# EAGLE board HV Board rev4 (EAGLE 8.4.1), part 1 of 2
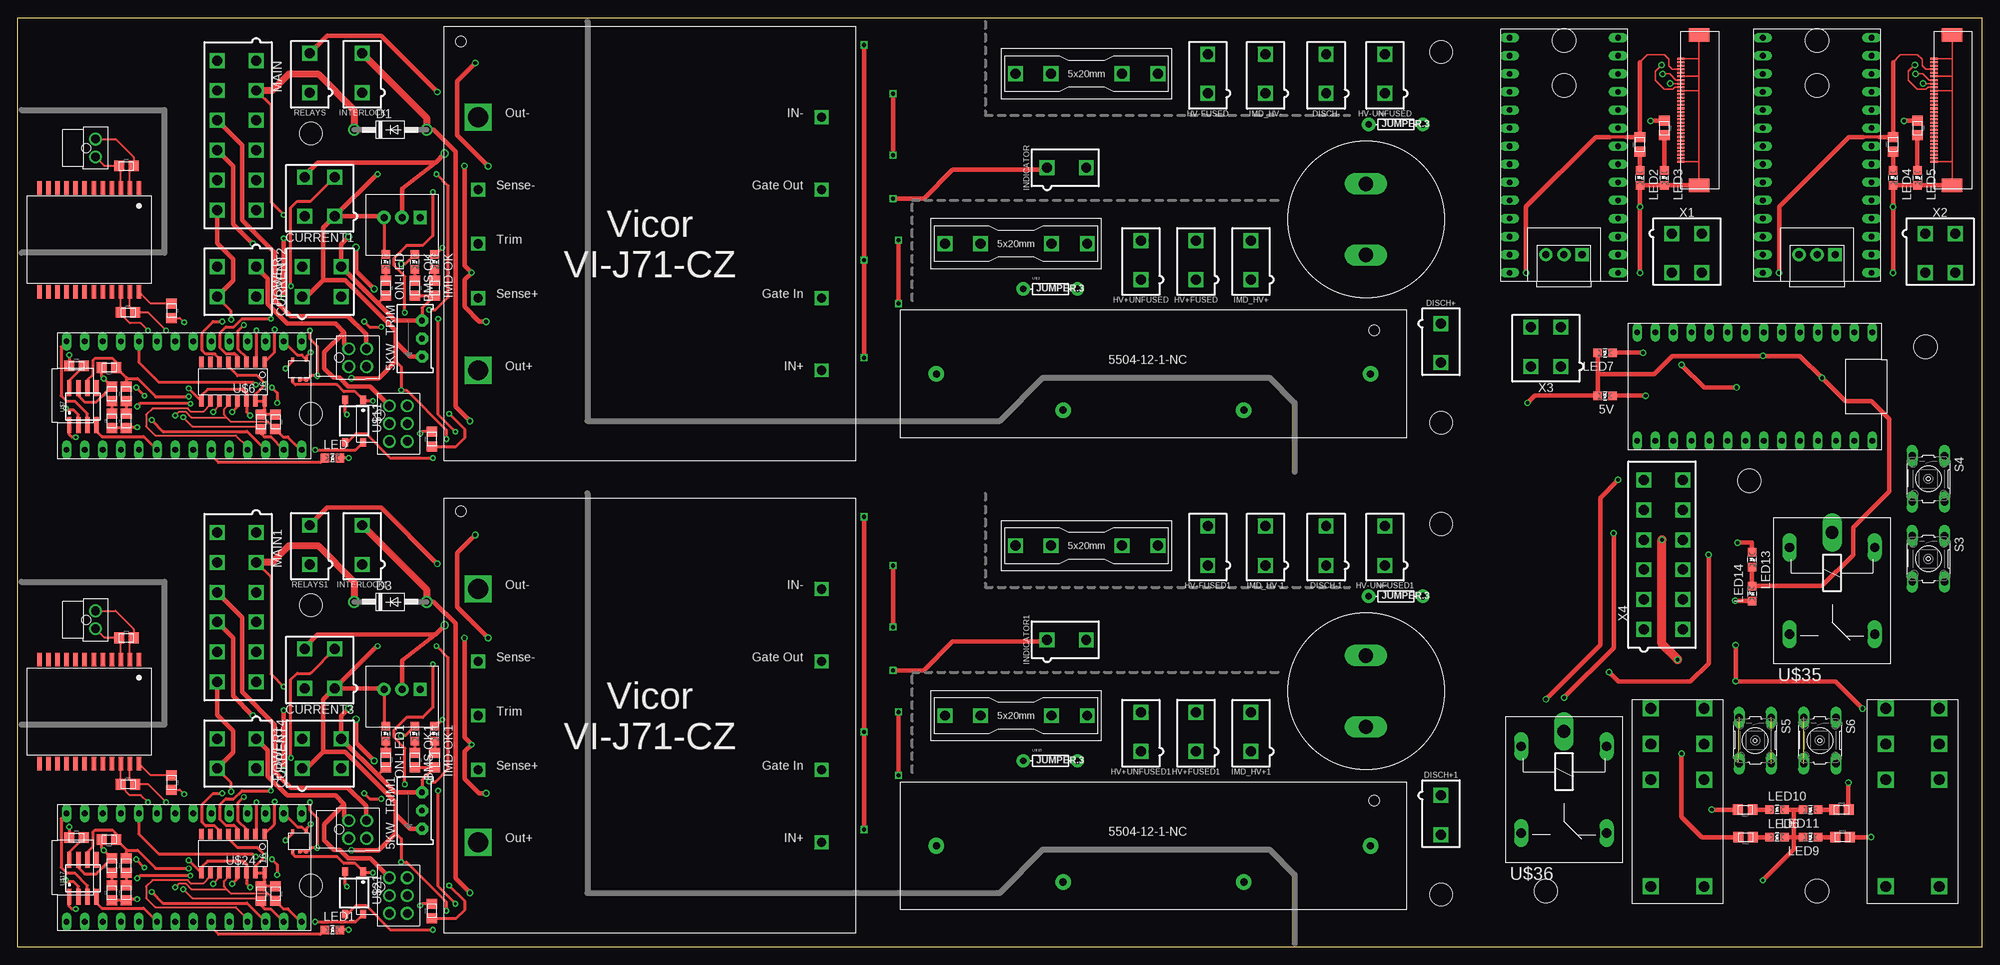
[diagram p0: board, top side]
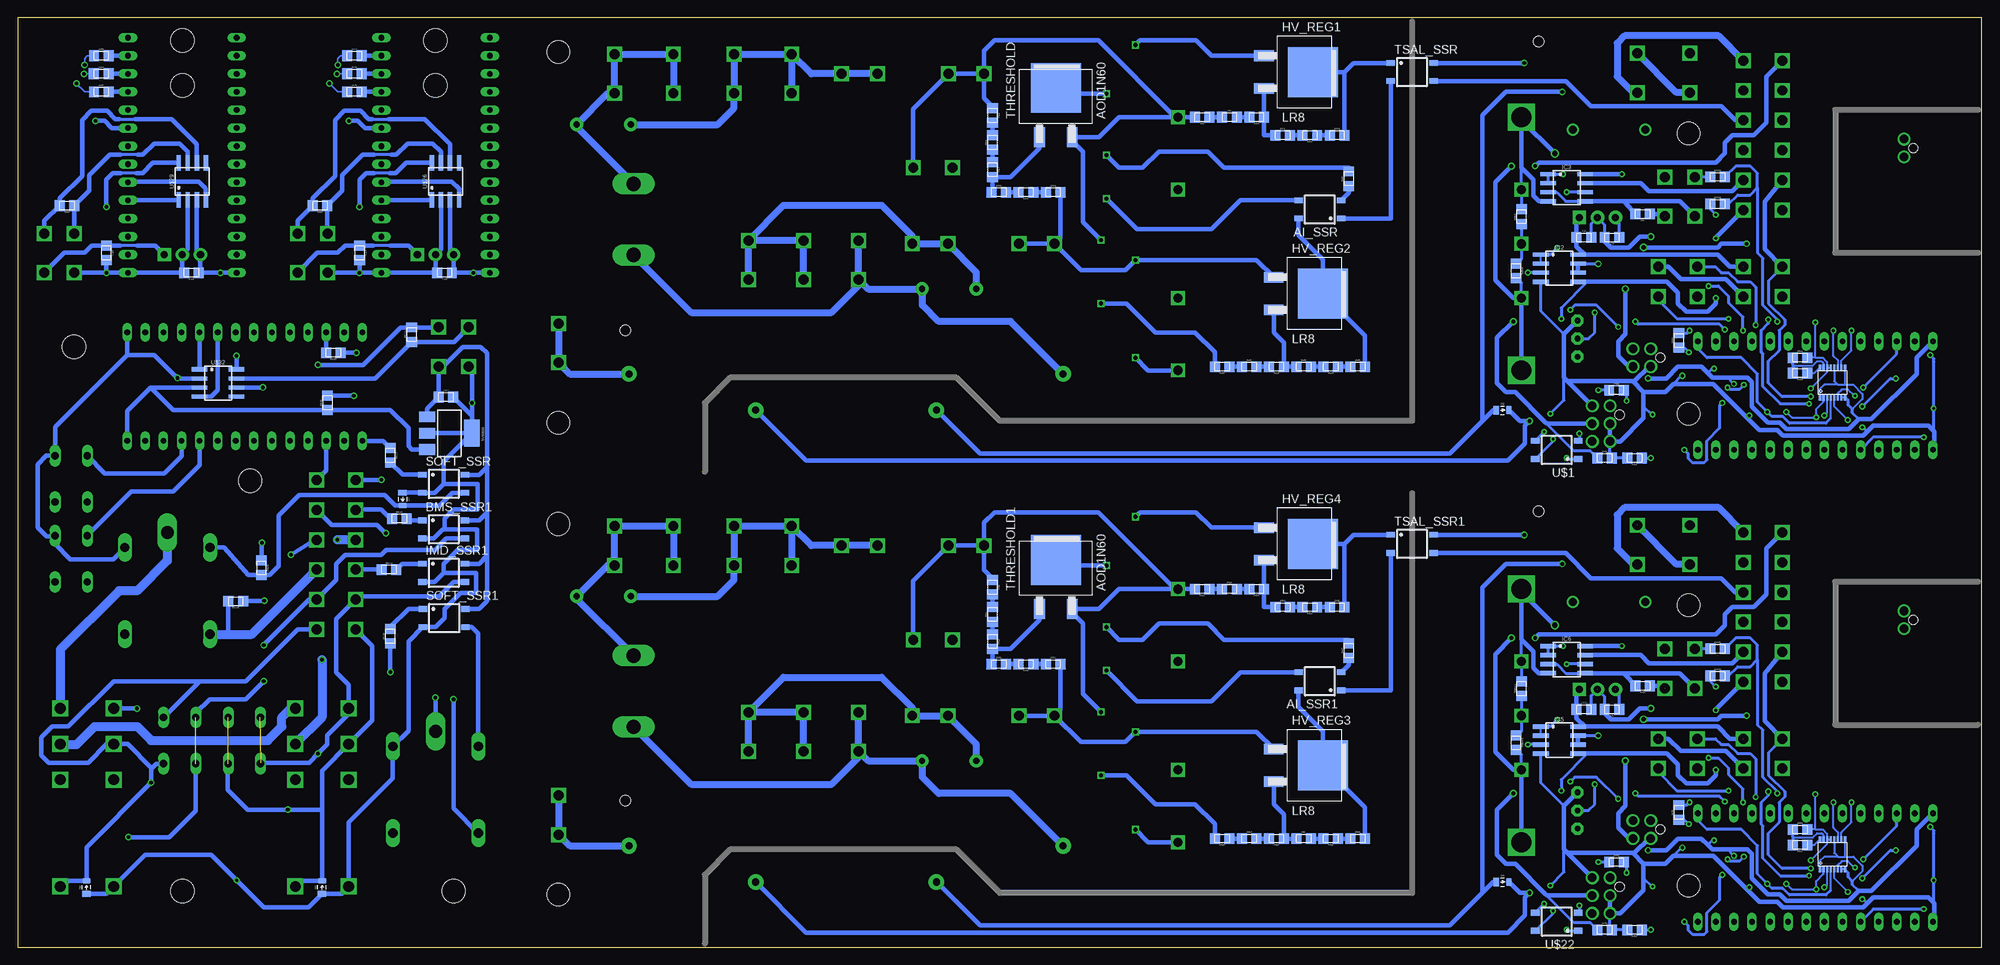
[diagram p1: board, bottom side, seen from below]

Size 275.84 x 130.56 mm. Coordinates in mm from the lower left corner, seen from the top.
Outline: 0,0 0,130.56 275.84,130.56 275.84,0 0,0
Copper layers (1*16): Top 0.035mm / dielectric 1.5mm / Bottom 0.035mm
Design rules "DRC Advanced Circuits": minimum track width 6mil, minimum drill 15mil, track to track 6mil, track to pad 6mil, pad to pad 6mil, via to via 6mil, smd to smd 6mil, copper to edge 40mil, drill to drill 6mil, minimum pad ring 10mil, minimum via ring 8mil, stop-mask expansion 4mil, vias tented up to drill 0mil, thermal gap 10mil
Holes 3.3 mm at 217.17,127.38 217.17,121.03 252.73,127.38 252.73,121.03 214.63,7.87 267.97,84.33 252.73,7.87 243.21,65.53
Holes 3.2 mm at 41.15,114.3 41.15,74.93 199.9,73.66 199.9,125.73 41.15,48.01 41.15,8.64 199.9,7.37 199.9,59.44
Holes 1.5 mm at 62.23,127.25 62.23,61.21 190.5,86.61 190.5,20.57

## Footprints (pad centres in the part's own frame; a part is rotated, then mirrored left to right if it is on the bottom)
TRIMPOT_3296 = drill 0.813 pad 1.676 octagon: 1 2.54,1.27; 2 0,1.27; 3 -2.54,1.27
LED-805 = smd 1.2 x 1.2: A 0,-1.05; C 0,1.05
SOT223 = smd 1.5 x 2.235: 1 -2.3,-3.15; 2 0,-3.15; 3 2.3,-3.15 | smd 3.8 x 2.2: 4 0,3.15
SOP04 = smd 0.8 x 1.2: 1 -1.27,-3; 2 1.27,-3; 3 1.27,3; 4 -1.27,3
LLS2V221MELZ = drill 2 long: P$1 -5,0; P$2 5,0
0805 = smd 1.4 x 1.5: 1 -1.025,0; 2 1.025,0
MINIFIT_5566-4 = drill 1.4 square: 1 2.1,-2.75; 2 -2.1,-2.75; 3 2.1,2.75; 4 -2.1,2.75
DO-41 = drill 1.118: A 5.08,0; C -5.08,0
0805_D = smd 0.8 x 1.2: A -0.9,0; C 0.9,0
MINIFIT_5566-2 = drill 1.4 square: 1 0,-2.75; 2 0,2.75
NANO-FIT_VERTICAL-4 = drill 1.2: P$1 -1.25,0; P$2 1.25,0; P$3 -1.25,2.5; P$4 1.25,2.5 | hole 1.3: 0,-1.34
0751.0110 = drill 1.4 square: L1 -10,0; L2 -5,0; R1 5,0; R2 10,0
TO-252 = smd 1.499 x 2.794: 1 -2.286,0; 3 2.286,0 | smd 7.01 x 7.01: 2(TAB) 0,6.909
OKI-78SR = drill 1 pad 1.88 square: 1 -2.54,0 | drill 1 pad 1.88: 2 0,0; 3 2.54,0
SOIC-08 = smd 0.6 x 2.2: 1 -1.905,-2.6; 2 -0.635,-2.6; 3 0.635,-2.6; 4 1.905,-2.6; 5 1.905,2.6; 6 0.635,2.6; 7 -0.635,2.6; 8 -1.905,2.6
TO-220 = drill 1 pad 1.88 square: 1 -2.54,0 | drill 1 pad 1.88: 2 0,0; 3 2.54,0
NANO-FIT_VERTICAL-6 = drill 1.2: P$1 -2.5,0; P$2 0,0; P$3 2.5,0; P$4 -2.5,2.5; P$5 0,2.5; P$6 2.5,2.5 | hole 1.3: -1.25,-1.34
NANO-FIT_VERTICAL-2 = drill 1.2: P$1 -1.25,0; P$2 1.25,0 | hole 1.3: 0,-1.34
MINIFIT_5566-12 = drill 1.4 square: 1 10.5,-2.75; 2 6.3,-2.75; 3 2.1,-2.75; 4 -2.1,-2.75; 5 -6.3,-2.75; 6 -10.5,-2.75; 7 10.5,2.75; 8 6.3,2.75; 9 2.1,2.75; 10 -2.1,2.75; 11 -6.3,2.75; 12 -10.5,2.75
B3F-10XX = drill 1.016 long: 1 -3.251,2.261; 2 3.251,2.261; 3 -3.251,-2.261; 4 3.251,-2.261
SM51589PEL = smd 0.635 x 1.905: 1 0,0; 2 1.27,0; 3 2.54,0; 4 3.81,0; 5 5.08,0; 6 6.35,0; 7 7.62,0; 8 8.89,0; 9 10.16,0; 10 11.43,0; 11 12.7,0; 12 13.97,0; 13 13.97,14.605; 14 12.7,14.605; 15 11.43,14.605; 16 10.16,14.605; 17 8.89,14.605; 18 7.62,14.605; 19 6.35,14.605; 20 5.08,14.605; 21 3.81,14.605; 22 2.54,14.605; 23 1.27,14.605; 24 0,14.605
AXIAL-0.3 = drill 0.9 pad 1.88: P$1 -3.81,0; P$2 3.81,0
HV_DCDC_VI-J71-CZ = drill 1.3 square: 1VIN+ 5.08,-12.7; 2GATEIN 5.08,-22.86; 3GATEOUT 5.08,-38.1; 4VIN- 5.08,-48.26; 6SENSE+ 53.34,-22.86; 7TRIM 53.34,-30.48; 8SENSE- 53.34,-38.1 | drill 2.8 square: 5VOUT+ 53.34,-12.7; 9VOUT- 53.34,-48.26
SOIC-16 = smd 0.61 x 1.524: 1 -4.445,-2.794; 2 -3.175,-2.794; 3 -1.905,-2.794; 4 -0.635,-2.794; 5 0.635,-2.794; 6 1.905,-2.794; 7 3.175,-2.794; 8 4.445,-2.794; 9 4.445,2.667; 10 3.175,2.667; 11 1.905,2.667; 12 0.635,2.667; 13 -0.635,2.667; 14 -1.905,2.667; 15 -3.175,2.667; 16 -4.445,2.667
MSOP-16 = smd 0.305 x 0.889: 1 -0.1,-0.5; 2 0.4,-0.5; 3 0.9,-0.5; 4 1.4,-0.5; 5 1.9,-0.5; 6 2.4,-0.5; 7 2.9,-0.5; 8 3.4,-0.5; 9 3.4,3.7; 10 2.9,3.7; 11 2.4,3.7; 12 1.9,3.7; 13 1.4,3.7; 14 0.9,3.7; 15 0.4,3.7; 16 -0.1,3.7
TEENSY_3.2_SIMPLE = drill 0.8 long: 3.3V 16.51,29.21; A0 16.51,3.81; A1 16.51,6.35; A2 16.51,8.89; A3 16.51,11.43; A4 16.51,13.97; A5 16.51,16.51; A6 16.51,19.05; A7 16.51,21.59; A8 16.51,24.13; A9 16.51,26.67; AGND 16.51,31.75; D0(RX1) 1.27,31.75; D1(TX1) 1.27,29.21; D2 1.27,26.67; D3(CANTX) 1.27,24.13; D4(CANRX) 1.27,21.59; D5 1.27,19.05; D6 1.27,16.51; D7(RX3) 1.27,13.97; D8(TX3) 1.27,11.43; D9(RX2) 1.27,8.89; D10(TX2) 1.27,6.35; D11 1.27,3.81; D12 1.27,1.27; D13 16.51,1.27; GND 1.27,34.29; VIN 16.51,34.29
SOT23-5 = smd 0.61 x 0.406: EN -2.794,0; GND -2.794,0.94; VCC 0,1.905; WDI 0,0; WDO -2.794,1.905
5504-12-1-NC = drill 1.016 pad 2.184: COIL+ 48.26,-14.097; COIL- 22.86,-14.097; CONTACT1 5.08,-9.017; CONTACT2 66.04,-9.017
FFC-30P-0.5MM = smd 1 x 0.284: 1 0,7.5; 2 0,7; 3 0,6.5; 4 0,6; 5 0,5.5; 6 0,5; 7 0,4.5; 8 0,4; 9 0,3.5; 10 0,3; 11 0,2.5; 12 0,2; 13 0,1.5; 14 0,1; 15 0,0.5; 16 0,0; 17 0,-0.5; 18 0,-1; 19 0,-1.5; 20 0,-2; 21 0,-2.5; 22 0,-3; 23 0,-3.5; 24 0,-4; 25 0,-4.5; 26 0,-5; 27 0,-5.5; 28 0,-6; 29 0,-6.5; 30 0,-7 | smd 2.85 x 1.905: PAD@0 -2.54,-10.302; PAD@1 -2.54,10.802
G2RL-2 = drill 1.5 square: 2 10.008,0; 3 5.004,0; 4 0,0; 5 0,7.493; 6 5.004,7.493; 7 10.008,7.493; COIL+ 25.019,0; COIL- 25.019,7.493
ZF112 = drill 1.321 long: 1 4.064,14.884; 2 4.064,2.896; O 16.256,14.884; S 16.256,2.896 | drill 1.803 long: P 1.956,8.89

## Placement (x,y rotation side)
5KW_TRIM  [TRIMPOT_3296]  55.5,85.47 270 top
5KW_TRIM1  [TRIMPOT_3296]  55.5,19.18 270 top
5V  [LED-805]  222.95,77.47 90 top
5VREG  [SOT223]  215.2,72.2 270 bottom
AI_SSR  CPC1002N  [SOP04]  92.96,103.63 90 bottom
AI_SSR1  CPC1002N  [SOP04]  92.96,37.34 90 bottom
BMS-OK  GREEN  [LED-805]  55.75,96.27 180 top
BMS-OK1  GREEN  [LED-805]  55.75,29.97 180 top
BMS_SSR1  CPC1002N  [SOP04]  216.03,58.67 270 bottom
C1  220uF  [LLS2V221MELZ]  189.36,102.23 90 top
C2  10uF  [0805]  55.88,99.69 0 bottom
C3  10uF  [0805]  51.94,99.69 180 bottom
C4  27pF  [0805]  21.59,89.41 270 top
C5  10uF  [0805]  51.94,33.4 180 bottom
C6  220uF  [LLS2V221MELZ]  189.36,35.94 90 top
C7  560pF  [0805]  13.21,7.62 90 top
C8  560pF  [0805]  13.21,73.91 90 top
C9  560pF  [0805]  15.24,73.91 90 top
C10  560pF  [0805]  15.24,7.62 90 top
C11  27pF  [0805]  21.59,23.11 270 top
C12  10uF  [0805]  55.88,33.4 0 bottom
C13  0.1uF  [0805]  215.9,94.74 180 bottom
C14  0.33uF  [0805]  227.84,97.54 270 bottom
C15  0.1uF  [0805]  251.46,94.74 180 bottom
C16  0.33uF  [0805]  263.4,97.54 270 bottom
C17  .22uF  [0805]  215.71,77.28 0 bottom
CURRENT1  CONNECTOR-4  [MINIFIT_5566-4]  42.42,105.41 0 top
CURRENT2  CONNECTOR-4  [MINIFIT_5566-4]  42.67,93.47 270 top
CURRENT3  CONNECTOR-4  [MINIFIT_5566-4]  42.42,39.12 0 top
CURRENT4  CONNECTOR-4  [MINIFIT_5566-4]  42.67,27.18 270 top
D1  DIODE  [DO-41]  52.32,114.81 0 top
D2  DIODE0805  [0805_D]  67.31,75.44 0 bottom
D3  DIODE  [DO-41]  52.32,48.51 0 top
D4  DIODE0805  [0805_D]  67.31,9.14 0 bottom
D5  DIODE0805  [0805_D]  233.11,8.38 90 bottom
D6  DIODE0805  [0805_D]  266.19,8.38 90 bottom
D7  DIODE0805  [0805_D]  221.81,62.93 270 bottom
DISCH+  DISCHARGE+  [MINIFIT_5566-2]  199.9,84.84 180 top
DISCH+1  DISCHARGE+  [MINIFIT_5566-2]  199.9,18.54 180 top
DISCH-  DISCHARGE -  [MINIFIT_5566-2]  183.77,122.68 0 top
DISCH-1  DISCHARGE -  [MINIFIT_5566-2]  183.77,56.39 0 top
EM  CONNECTOR-4  [NANO-FIT_VERTICAL-4]  46.48,82.8 270 top
EM1  CONNECTOR-4  [NANO-FIT_VERTICAL-4]  46.48,16.51 270 top
FUSE  1A  [0751.0110]  140.21,98.81 180 top
FUSE1  1A  [0751.0110]  150.11,122.68 180 top
FUSE2  1A  [0751.0110]  140.21,32.51 180 top
FUSE3  1A  [0751.0110]  150.11,56.39 180 top
HV+FUSED  FUSED+  [MINIFIT_5566-2]  165.48,96.52 0 top
HV+FUSED1  FUSED+  [MINIFIT_5566-2]  165.48,30.23 0 top
HV+UNFUSED  FSAE  [MINIFIT_5566-2]  157.73,96.52 0 top
HV+UNFUSED1  FSAE  [MINIFIT_5566-2]  157.73,30.23 0 top
HV-FUSED  FUSED-  [MINIFIT_5566-2]  167.13,122.68 0 top
HV-FUSED1  FUSED-  [MINIFIT_5566-2]  167.13,56.39 0 top
HV-UNFUSED  FSAE  [MINIFIT_5566-2]  192.02,122.68 0 top
HV-UNFUSED1  FSAE  [MINIFIT_5566-2]  192.02,56.39 0 top
HV_REG1  LR8  [TO-252]  100.84,122.94 270 bottom
HV_REG2  LR8  [TO-252]  99.44,91.82 270 bottom
HV_REG3  LR8  [TO-252]  99.44,25.53 270 bottom
HV_REG4  LR8  [TO-252]  100.84,56.64 270 bottom
IC1  OKI-78SR  [OKI-78SR]  53.98,102.49 180 top
IC2  NE5532SOIC  [SOIC-08]  59.31,95.38 270 bottom
IC3  NE5532SOIC  [SOIC-08]  58.29,106.68 270 bottom
IC4  OKI-78SR  [OKI-78SR]  53.98,36.19 180 top
IC5  NE5532SOIC  [SOIC-08]  59.31,29.08 270 bottom
IC6  NE5532SOIC  [SOIC-08]  58.29,40.39 270 bottom
IC7  [TO-220]  217.17,97.28 180 top
IC8  [TO-220]  252.73,97.28 180 top
IMD  CONNECTOR-6  [NANO-FIT_VERTICAL-6]  52.2,73.53 270 top
IMD1  CONNECTOR-6  [NANO-FIT_VERTICAL-6]  52.2,7.24 270 top
IMD-OK  YELLOW  [LED-805]  58.55,96.27 180 top
IMD-OK1  YELLOW  [LED-805]  58.55,29.97 180 top
IMD_HV+  IMD+  [MINIFIT_5566-2]  173.23,96.52 0 top
IMD_HV+1  IMD+  [MINIFIT_5566-2]  173.23,30.23 0 top
IMD_HV-  IMD-  [MINIFIT_5566-2]  175.26,122.68 0 top
IMD_HV-1  IMD-  [MINIFIT_5566-2]  175.26,56.39 0 top
IMD_SSR1  CPC1002N  [SOP04]  216.03,52.58 270 bottom
INDICATOR  INDICATOR  [MINIFIT_5566-2]  147.32,109.47 270 top
INDICATOR1  INDICATOR  [MINIFIT_5566-2]  147.32,43.18 270 top
INTERLOCK  [MINIFIT_5566-2]  48.39,122.81 0 top
INTERLOCK1  [MINIFIT_5566-2]  48.39,56.52 0 top
ISOSPI  CONNECTOR-2  [NANO-FIT_VERTICAL-2]  10.92,112.27 270 top
ISOSPI1  CONNECTOR-2  [NANO-FIT_VERTICAL-2]  10.92,45.97 270 top
LED  BLUE  [LED-805]  44.2,68.71 270 top
LED1  BLUE  [LED-805]  44.2,2.41 270 top
LED2  [LED-805]  227.84,108.08 180 top
LED3  [LED-805]  231.27,108.08 180 top
LED4  [LED-805]  263.4,108.08 180 top
LED5  [LED-805]  266.83,108.08 180 top
LED6  [LED-805]  247.08,15.43 270 top
LED7  [LED-805]  222.95,83.5 90 top
LED9  [LED-805]  251.78,15.43 90 top
LED10  [LED-805]  247.08,19.3 270 top
LED11  [LED-805]  251.78,19.3 90 top
LED13  [LED-805]  243.59,54.42 180 top
LED14  [LED-805]  243.59,49.66 0 top
MAIN  CONNECTOR-12  [MINIFIT_5566-12]  30.73,114.05 90 top
MAIN1  CONNECTOR-12  [MINIFIT_5566-12]  30.73,47.75 90 top
ON-LED  PURPLE  [LED-805]  51.69,96.27 180 top
ON-LED1  PURPLE  [LED-805]  51.69,29.97 180 top
POWER  CONNECTOR-4  [MINIFIT_5566-4]  30.73,93.47 90 top
POWER1  CONNECTOR-4  [MINIFIT_5566-4]  30.73,27.18 90 top
R1  2k  [0805]  95.25,15.24 0 bottom
R2  820  [0805]  58.55,26.29 90 top
R3  820  [0805]  58.55,92.58 90 top
R4  820  [0805]  55.75,92.58 270 top
R5  270  [0805]  51.69,92.58 270 top
R6  10k  [0805]  47.62,103 180 bottom
R7  820  [0805]  55.75,26.29 270 top
R8  8.2k  [0805]  109.47,116.59 180 bottom
R9  8.2k  [0805]  105.66,116.59 0 bottom
R10  8.2k  [0805]  101.85,116.59 180 bottom
R11  2k  [0805]  98.17,114.05 0 bottom
R12  2k  [0805]  94.36,114.05 180 bottom
R13  2k  [0805]  90.55,114.05 0 bottom
R14  510k  [0805]  130.43,106.04 0 bottom
R15  510k  [0805]  134.24,106.04 180 bottom
R16  510k  [0805]  138.05,106.04 0 bottom
R17  43k  [0805]  138.94,109.22 270 bottom
R18  43k  [0805]  138.94,113.03 90 bottom
R19  43k  [0805]  138.94,116.84 270 bottom
R20  20k  [0805]  106.68,81.53 180 bottom
R21  20k  [0805]  102.87,81.53 0 bottom
R22  20k  [0805]  99.06,81.53 180 bottom
R23  2k  [0805]  95.25,81.53 0 bottom
R24  2k  [0805]  91.44,81.53 180 bottom
R25  2k  [0805]  87.63,81.53 0 bottom
R26  1k  [0805]  88.9,107.95 90 bottom
R27  120  [0805]  12.83,81.41 180 top
R28  100  [0805]  13.21,77.72 90 top
R29  100  [0805]  15.24,77.72 90 top
R30  1k  [0805]  8.26,81.66 0 top
R31  43  [0805]  48.77,68.71 180 bottom
R32  20k  [0805]  99.06,15.24 180 bottom
R33  1k  [0805]  25.53,80.64 180 bottom
R34  1k  [0805]  25.53,82.8 0 bottom
R35  120  [0805]  15.49,89.15 0 top
R36  2k  [0805]  34.16,73.79 270 top
R37  2k  [0805]  36.2,73.79 270 top
R38  430  [0805]  51.31,78.23 0 bottom
R39  200  [0805]  58.17,71.37 90 top
R40  100  [0805]  15.24,109.73 0 top
R41  2k  [0805]  52.96,68.71 0 bottom
R42  10k  [0805]  42.55,85.22 90 bottom
R43  10k  [0805]  47.62,36.7 180 bottom
R44  270  [0805]  51.69,26.29 270 top
R45  510k  [0805]  138.05,39.75 0 bottom
R46  43k  [0805]  138.94,50.55 270 bottom
R47  1k  [0805]  88.9,41.66 90 bottom
R48  2k  [0805]  90.55,47.75 0 bottom
R49  510k  [0805]  134.24,39.75 180 bottom
R50  510k  [0805]  130.43,39.75 0 bottom
R51  43k  [0805]  138.94,46.74 90 bottom
R52  43k  [0805]  138.94,42.93 270 bottom
R53  2k  [0805]  94.36,47.75 180 bottom
R54  2k  [0805]  98.17,47.75 0 bottom
R55  2k  [0805]  91.44,15.24 180 bottom
R56  2k  [0805]  87.63,15.24 0 bottom
R57  20k  [0805]  102.87,15.24 0 bottom
R58  20k  [0805]  106.68,15.24 180 bottom
R59  8.2k  [0805]  101.85,50.29 180 bottom
R60  8.2k  [0805]  105.66,50.29 0 bottom
R61  8.2k  [0805]  109.47,50.29 180 bottom
R62  120  [0805]  12.83,15.11 180 top
R63  100  [0805]  13.21,11.43 90 top
R64  100  [0805]  15.24,11.43 90 top
R65  1k  [0805]  8.26,15.37 0 top
R66  43  [0805]  48.77,2.41 180 bottom
R67  1k  [0805]  25.53,14.35 180 bottom
R68  1k  [0805]  25.53,16.51 0 bottom
R69  120  [0805]  15.49,22.86 0 top
R70  2k  [0805]  34.16,7.49 270 top
R71  2k  [0805]  36.2,7.49 270 top
R72  430  [0805]  51.31,11.94 0 bottom
R73  200  [0805]  58.17,5.08 90 top
R74  100  [0805]  15.24,43.43 0 top
R75  2k  [0805]  52.96,2.41 0 bottom
R76  10k  [0805]  42.55,18.92 90 bottom
R77  [0805]  228.56,125.22 0 bottom
R78  [0805]  228.56,122.69 0 bottom
R79  [0805]  228.56,120.15 0 bottom
R80  120  [0805]  233.39,104.16 180 bottom
R81  [0805]  227.84,112.77 90 top
R82  [0805]  231.27,115.06 270 top
R83  [0805]  264.12,125.22 0 bottom
R84  [0805]  264.12,122.69 0 bottom
R85  [0805]  264.12,120.15 0 bottom
R86  120  [0805]  268.95,104.16 180 bottom
R87  [0805]  263.4,112.77 90 top
R88  [0805]  266.83,115.06 270 top
R105  [0805]  231.52,83.5 180 bottom
R106  [0805]  232.35,76.45 90 bottom
R107  [0805]  242.63,19.3 180 top
R108  [0805]  256.16,19.3 0 top
R109  [0805]  241.62,53.28 270 bottom
R110  [0805]  245.24,48.58 180 bottom
R111  [0805]  242.7,15.43 180 top
R112  [0805]  256.29,15.43 0 top
R113  120  [0805]  220.54,86.04 90 bottom
R114  [0805]  223.71,53.02 0 bottom
R115  [0805]  222.25,60.2 0 bottom
R116  [0805]  223.52,43.69 90 bottom
R117  [0805]  223.52,69.09 270 bottom
R118  43k  [0805]  37.08,104.39 0 bottom
R119  12k  [0805]  37.08,108.2 0 bottom
R120  43k  [0805]  37.08,38.1 0 bottom
R121  12k  [0805]  37.08,41.91 0 bottom
RELAYS  [MINIFIT_5566-2]  41.02,122.81 0 top
RELAYS1  [MINIFIT_5566-2]  41.02,56.52 0 top
S3  [B3F-10XX]  268.35,54.55 270 top
S4  [B3F-10XX]  268.35,65.79 270 top
S5  [B3F-10XX]  244.03,29.02 270 top
S6  [B3F-10XX]  253.11,29.02 270 top
SOFT_SSR  CPC1002N  [SOP04]  216.03,65.09 270 bottom
SOFT_SSR1  CPC1002N  [SOP04]  215.96,46.23 270 bottom
THRESHOLD  AOD1N60  [TO-252]  130.05,113.79 0 bottom
THRESHOLD1  AOD1N60  [TO-252]  130.05,47.5 0 bottom
TRIM+  [0805]  65.41,95 270 bottom
TRIM+1  [0805]  65.41,28.7 270 bottom
TRIM-  [0805]  64.64,102.62 90 bottom
TRIM-1  [0805]  64.64,36.32 90 bottom
TSAL_SSR  CPC1002N  [SOP04]  80.01,122.94 270 bottom
TSAL_SSR1  CPC1002N  [SOP04]  80.01,56.64 270 bottom
U$1  [SOP04]  59.69,69.85 90 bottom
U$2  SM51589PEL  [SM51589PEL]  17.02,106.68 180 top
U$3  JUMPER.3  [AXIAL-0.3]  145.03,92.46 0 top
U$4  JUMPER.3  [AXIAL-0.3]  193.55,115.57 0 top
U$5  HV_DCDC_VI-J71-CZ  [HV_DCDC_VI-J71-CZ]  117.98,68.33 180 top
U$6  MCP3208SOIC  [SOIC-16]  30.23,79.38 180 top
U$7  MCP2551  [SOIC-08]  9.14,75.95 0 top
U$8  LTC6820  [MSOP-16]  22.61,77.72 0 bottom
U$9  TEENSY_3.2_SIMPLE  [TEENSY_3.2_SIMPLE]  41.15,68.58 90 top
U$10  STWD100  [SOT23-5]  40.51,82.55 90 top
U$11  [SOP04]  47.24,73.91 180 top
U$12  5504-12-1-NC  [5504-12-1-NC]  123.95,89.53 0 top
U$13  5504-12-1-NC  [5504-12-1-NC]  123.95,23.24 0 top
U$14  HV_DCDC_VI-J71-CZ  [HV_DCDC_VI-J71-CZ]  117.98,2.03 180 top
U$15  JUMPER.3  [AXIAL-0.3]  145.03,26.16 0 top
U$16  JUMPER.3  [AXIAL-0.3]  193.55,49.28 0 top
U$17  MCP2551  [SOIC-08]  9.14,9.65 0 top
U$18  LTC6820  [MSOP-16]  22.61,11.43 0 bottom
U$19  TEENSY_3.2_SIMPLE  [TEENSY_3.2_SIMPLE]  41.15,2.29 90 top
U$20  STWD100  [SOT23-5]  40.51,16.26 90 top
U$21  [SOP04]  47.24,7.62 180 top
U$22  [SOP04]  59.69,3.56 90 bottom
U$23  SM51589PEL  [SM51589PEL]  17.02,40.39 180 top
U$24  MCP3208SOIC  [SOIC-16]  30.23,13.08 180 top
U$25  TEENSY_3.2_SIMPLE  [TEENSY_3.2_SIMPLE]  226.06,129.03 180 top
U$26  MCP2551  [SOIC-08]  215.77,107.57 0 bottom
U$27  FFC-30P-0.5MM  [FFC-30P-0.5MM]  233.59,117.82 180 top
U$28  TEENSY_3.2_SIMPLE  [TEENSY_3.2_SIMPLE]  261.62,129.03 180 top
U$29  MCP2551  [SOIC-08]  251.33,107.57 0 bottom
U$30  FFC-30P-0.5MM  [FFC-30P-0.5MM]  269.15,117.82 180 top
U$31  TEENSY_3.2_SIMPLE  [TEENSY_3.2_SIMPLE]  226.19,87.63 270 top
U$32  MCP2551  [SOIC-08]  247.71,79.25 270 bottom
U$33  G2RL-2-DC12  [G2RL-2]  229.36,33.53 270 top
U$34  G2RL-2-DC12  [G2RL-2]  262.38,33.53 270 top
U$35  G5LE  [ZF112]  245.94,60.2 270 top
U$36  G5LE  [ZF112]  208.28,32.26 270 top
X1  CONNECTOR-4  [MINIFIT_5566-4]  234.44,97.5 180 top
X2  CONNECTOR-4  [MINIFIT_5566-4]  270,97.5 180 top
X3  CONNECTOR-4  [MINIFIT_5566-4]  214.63,84.33 0 top
X4  CONNECTOR-12  [MINIFIT_5566-12]  231.14,55.12 270 top

## Library data of the parts
5KW_TRIM 5KW_TRIM1 5V 5VREG AI_SSR AI_SSR1 BMS-OK BMS-OK1 BMS_SSR1 C1-C17 D1-D7 EM EM1 FUSE FUSE1-FUSE3 HV_REG1-HV_REG4 IC1-IC8 IMD IMD1 IMD-OK IMD-OK1 IMD_SSR1 ISOSPI ISOSPI1 LED LED1-LED7 LED9-LED11 LED13 LED14 ON-LED ON-LED1 R1-R88 R105-R121 SOFT_SSR SOFT_SSR1 THRESHOLD THRESHOLD1 TRIM+ TRIM+1 TRIM- TRIM-1 TSAL_SSR TSAL_SSR1 U$1-U$36 = HyTechDevices
CURRENT1-CURRENT4 MAIN MAIN1 POWER POWER1 X1-X4 = HyTechDevices; OC_FARNELL: unknown; OC_NEWARK: unknown
DISCH+ DISCH+1 DISCH- DISCH-1 HV+FUSED HV+FUSED1 HV+UNFUSED HV+UNFUSED1 HV-FUSED HV-FUSED1 HV-UNFUSED HV-UNFUSED1 IMD_HV+ IMD_HV+1 IMD_HV- IMD_HV-1 INDICATOR INDICATOR1 INTERLOCK INTERLOCK1 RELAYS RELAYS1 = HyTechDevices; OC_FARNELL: 1822072; OC_NEWARK: unknown
S3-S6 = HyTechDevices; MPN: B3F-1000; OC_FARNELL: 176432; OC_NEWARK: 36M3542

## Nets
5KW_TRIG: 5KW_TRIM.2 IC3.6
5KW_TRIG1: 5KW_TRIM1.2 IC6.6
+3V1: U$18.6 U$19.3.3V
+3V3: U$8.6 U$9.3.3V
+5V: 5KW_TRIM.1 C3.1 CURRENT1.1 CURRENT2.1 IC1.3 IC3.8 ON-LED.A R6.1 R36.1 R37.1 R38.1 U$1.4 U$6.5 U$6.15 U$6.16 U$7.3 U$8.1 U$8.7 U$8.8 U$8.9 U$8.12 U$9.VIN U$10.VCC
+5V1: 5KW_TRIM1.1 C5.1 CURRENT3.1 CURRENT4.1 IC4.3 IC6.8 ON-LED1.A R43.1 R70.1 R71.1 R72.1 U$17.3 U$18.1 U$18.7 U$18.8 U$18.9 U$18.12 U$19.VIN U$20.VCC U$22.4 U$24.5 U$24.15 U$24.16
+5V2: C13.1 IC7.3 R81.2 U$25.VIN U$26.3 U$27.26 U$27.27
+5V3: C15.1 IC8.3 R87.2 U$28.VIN U$29.3 U$30.26 U$30.27
+5V4: 5VREG.3 R106.1 U$31.VIN U$32.3
+12V: C2.1 EM.P$1 IC1.1 IC2.8 IMD.P$1 POWER.1
+12V1: C12.1 EM1.P$1 IC4.1 IC5.8 IMD1.P$1 POWER1.1
+12V2: C14.1 IC7.1 X1.4
+12V3: C16.1 IC8.1 X2.4
+12V4: 5VREG.1 BMS_SSR1.4 C17.1 IMD_SSR1.4 SOFT_SSR1.4 SOFT_SSR.4 X3.1
BMS_12V: BMS_SSR1.3 R112.2 S6.3 S6.4 U$34.4 X4.8
BMS_INRLK: R116.1 X4.10
BMS_OK: IC2.5 MAIN.6 U$1.3
BMS_OK1: IC5.5 MAIN1.6 U$22.3
BMS_OK2: D6.C R108.2 S6.1 S6.2 U$34.3 U$34.COIL- X4.7
BMS_WATCH: U$1.1 U$11.3
BMS_WATCH1: U$21.3 U$22.1
BSPD_CUR_FAULT: IC3.7 MAIN.5
BSPD_CUR_FAULT1: IC6.7 MAIN1.5
BTN_X: S4.3 U$31.A9
BTN_Y: S3.3 U$31.A8
CANH: MAIN.12 POWER.4 R27.2 R28.2 U$7.7
CANH1: MAIN1.12 POWER1.4 R62.2 R63.2 U$17.7
CANH2: R80.1 U$26.7 X1.1
CANH3: R86.1 U$29.7 X2.1
CANH4: R113.1 U$32.7 X3.4
CANL: MAIN.11 POWER.3 R27.1 R29.2 U$7.6
CANL1: MAIN1.11 POWER1.3 R62.1 R64.2 U$17.6
CANL2: R80.2 U$26.6 X1.2
CANL3: R86.2 U$29.6 X2.2
CANL4: R113.2 U$32.6 X3.3
CANRX: U$25.D4(CANRX) U$26.4
CANRX1: U$28.D4(CANRX) U$29.4
CANRX2: U$31.D4(CANRX) U$32.4
CANTX: U$25.D3(CANTX) U$26.1
CANTX1: U$28.D3(CANTX) U$29.1
CANTX2: U$31.D3(CANTX) U$32.1
CS_LTC1: U$18.5 U$19.D10(TX2)
CS_LTC6820: U$8.5 U$9.D10(TX2)
CS_MCP1: U$19.D9(RX2) U$24.10
CS_MCP3208: U$6.10 U$9.D9(RX2)
CUR_SENSE_1: IC3.1 IC3.2 U$6.1
CUR_SENSE_1_RAW: CURRENT1.2 IC3.3 IC3.5 R6.2
CUR_SENSE_1_RAW1: CURRENT3.2 IC6.3 IC6.5 R43.2
CUR_SENSE_2: CURRENT2.2 U$6.3
CUR_SENSE_3: CURRENT4.2 U$24.3
CUR_SENSE_4: IC6.1 IC6.2 U$24.1
DISCHARGE_RELAY_GND: D2.A RELAYS.2 U$12.COIL-
DISCHARGE_RELAY_GND1: D4.A RELAYS1.2 U$13.COIL-
EM_IO1: EM.P$3 MAIN.9
EM_IO2: EM.P$4 MAIN.10
EM_IO3: EM1.P$3 MAIN1.9
EM_IO4: EM1.P$4 MAIN1.10
GND: 5KW_TRIM.3 C2.2 C3.2 C4.2 C8.1 C9.1 CURRENT1.4 CURRENT2.4 EM.P$2 IC1.2 IC2.4 IC3.4 IMD.P$2 IMD.P$3 IMD.P$4 POWER.2 R3.1 R4.2 R5.2 R30.1 R31.2 R34.2 R39.1 R41.2 R42.2 R119.1 TRIM-.2 U$5.8SENSE- U$5.9VOUT- U$6.9 U$6.14 U$7.2 U$8.13 U$8.14 U$9.GND U$10.EN U$10.GND U$11.2
GND1: 5KW_TRIM1.3 C5.2 C7.1 C10.1 C11.2 C12.2 CURRENT3.4 CURRENT4.4 EM1.P$2 IC4.2 IC5.4 IC6.4 IMD1.P$2 IMD1.P$3 IMD1.P$4 POWER1.2 R2.1 R7.2 R44.2 R65.1 R66.2 R68.2 R73.1 R75.2 R76.2 R121.1 TRIM-1.2 U$14.8SENSE- U$14.9VOUT- U$17.2 U$18.13 U$18.14 U$19.GND U$20.EN U$20.GND U$21.2 U$24.9 U$24.14
GND2: C13.2 C14.2 IC7.2 LED2.C LED3.C U$25.GND U$26.2 U$26.8 U$27.1 U$27.21 U$27.25 U$27.30 U$27.PAD@0 U$27.PAD@1 X1.3
GND3: C15.2 C16.2 IC8.2 LED4.C LED5.C U$28.GND U$29.2 U$29.8 U$30.1 U$30.21 U$30.25 U$30.30 U$30.PAD@0 U$30.PAD@1 X2.3
GND4: 5V.C 5VREG.2 5VREG.4 BMS_SSR1.2 C17.2 D5.A D6.A D7.A IMD_SSR1.2 LED6.C LED7.C LED9.C LED10.C LED11.C LED13.C LED14.C S3.1 S4.1 SOFT_SSR1.2 SOFT_SSR.2 U$31.GND U$32.2 U$32.8 U$33.COIL+ U$34.COIL+ U$35.1 U$36.1 X3.2
GPIO: U$31.A1 X4.12
HV+FUSED: FUSE.L1 FUSE.L2 HV+FUSED.1 HV+FUSED.2 IMD_HV+.1 IMD_HV+.2 U$3.P$1
HV+FUSED1: FUSE2.L1 FUSE2.L2 HV+FUSED1.1 HV+FUSED1.2 IMD_HV+1.1 IMD_HV+1.2 U$15.P$1
HV+FUSED_1A: FUSE.R1 FUSE.R2 HV_REG1.1 HV_REG2.1 R14.2 U$5.1VIN+
HV+FUSED_1A1: FUSE2.R1 FUSE2.R2 HV_REG3.1 HV_REG4.1 R50.2 U$14.1VIN+
HV+UNFUSED_FSAE: C1.P$1 HV+UNFUSED.1 HV+UNFUSED.2 U$3.P$2 U$12.CONTACT1
HV+UNFUSED_FSAE1: C6.P$1 HV+UNFUSED1.1 HV+UNFUSED1.2 U$13.CONTACT1 U$15.P$2
HV+UNFUSED_FSAE_DISCHARGE: DISCH+.1 DISCH+.2 U$12.CONTACT2
HV+UNFUSED_FSAE_DISCHARGE1: DISCH+1.1 DISCH+1.2 U$13.CONTACT2
HV-FUSED: FUSE1.L1 FUSE1.L2 HV-FUSED.1 HV-FUSED.2 IMD_HV-.1 IMD_HV-.2 U$4.P$1
HV-FUSED1: FUSE3.L1 FUSE3.L2 HV-FUSED1.1 HV-FUSED1.2 IMD_HV-1.1 IMD_HV-1.2 U$16.P$1
HV-FUSED_1A: FUSE1.R1 FUSE1.R2 INDICATOR.2 R8.2 R19.1 R20.2 THRESHOLD.3 U$5.4VIN-
HV-FUSED_1A1: FUSE3.R1 FUSE3.R2 INDICATOR1.2 R46.1 R58.2 R61.2 THRESHOLD1.3 U$14.4VIN-
HV-UNFUSED_FSAE: C1.P$2 DISCH-.1 DISCH-.2 HV-UNFUSED.1 HV-UNFUSED.2 U$4.P$2
HV-UNFUSED_FSAE1: C6.P$2 DISCH-1.1 DISCH-1.2 HV-UNFUSED1.1 HV-UNFUSED1.2 U$16.P$2
IMD_12V: IMD_SSR1.3 R111.2 S5.3 S5.4 U$33.4 X4.2
IMD_OK: D5.C R107.2 S5.1 S5.2 U$33.3 U$33.COIL- X4.1
ISOSPI-M: ISOSPI.P$2 R40.1 U$2.3
ISOSPI-M1: ISOSPI1.P$2 R74.1 U$23.3
ISOSPI-P: ISOSPI.P$1 R40.2 U$2.2
ISOSPI-P1: ISOSPI1.P$1 R74.2 U$23.2
MISO: R37.2 U$6.12 U$8.3 U$9.D12
MISO1: R71.2 U$18.3 U$19.D12 U$24.12
MOSI: R36.2 U$6.11 U$8.2 U$9.D11
MOSI1: R70.2 U$18.2 U$19.D11 U$24.11
N$1: AI_SSR.4 HV_REG2.2(TAB) R25.2
N$2: HV_REG1.2(TAB) R13.2 TSAL_SSR.1
N$3: ON-LED.C R5.1
N$4: R39.2 U$1.2
N$5: AI_SSR.2 R26.1
N$6: AI_SSR.1 TSAL_SSR.2
N$7: AI_SSR.3 INDICATOR.1
N$8: R8.1 R9.1
N$9: R26.2 THRESHOLD.2(TAB)
N$10: R14.1 R15.1
N$11: R15.2 R16.2
N$12: R17.1 R18.1
N$13: R18.2 R19.2
N$14: R9.2 R10.2
N$15: HV_REG2.3 R22.1 R23.1
N$16: R11.2 R12.2
N$17: R12.1 R13.1
N$18: HV_REG1.3 R10.1 R11.1
N$19: R23.2 R24.2
N$20: R24.1 R25.1
N$21: R21.2 R22.2
N$22: R16.1 R17.2 THRESHOLD.1
N$23: R20.1 R21.1
N$24: AI_SSR1.4 HV_REG3.2(TAB) R56.2
N$25: U$7.1 U$9.D3(CANTX)
N$26: R30.2 U$7.8
N$27: C8.2 R28.1
N$28: C9.2 R29.1
N$29: LED.C R31.1
N$30: HV_REG3.3 R1.1 R32.1
N$31: R33.1 U$8.16
N$32: R33.2 R34.1 U$8.15
N$33: R35.1 U$2.22 U$8.10
N$34: R35.2 U$2.23 U$8.11
N$35: C4.1 U$2.24
N$36: U$7.4 U$9.D4(CANRX)
N$37: LED.A U$9.D7(RX3)
N$38: R38.2 U$10.WDO U$11.1
N$39: IC5.1 IC5.2 IMD-OK1.A
N$40: U$9.A8 U$11.4
N$41: BMS-OK1.A IC5.6 IC5.7
N$42: IC2.1 IC2.2 IMD-OK.A
N$43: BMS-OK.A IC2.6 IC2.7
N$44: BMS-OK.C R4.1
N$45: IMD-OK.C R3.2
N$46: BMS-OK1.C R7.1
N$47: IMD-OK1.C R2.2
N$48: ON-LED1.C R44.1
N$49: HV_REG4.2(TAB) R48.2 TSAL_SSR1.1
N$50: R42.1 U$9.A0 U$10.WDI
N$51: R49.1 R50.1
N$52: R45.2 R49.2
N$53: R51.1 R52.1
N$54: R46.2 R51.2
N$55: AI_SSR1.2 R47.1
N$56: AI_SSR1.1 TSAL_SSR1.2
N$57: AI_SSR1.3 INDICATOR1.1
N$58: HV_REG4.3 R54.1 R59.1
N$59: R59.2 R60.2
N$60: R60.1 R61.1
N$61: R45.1 R52.2 THRESHOLD1.1
N$62: R53.2 R54.2
N$63: R48.1 R53.1
N$64: R47.2 THRESHOLD1.2(TAB)
N$65: R1.2 R55.2
N$66: R55.1 R56.1
N$67: R32.2 R57.2
N$68: R57.1 R58.1
N$69: U$17.1 U$19.D3(CANTX)
N$70: R65.2 U$17.8
N$71: C7.2 R63.1
N$72: C10.2 R64.1
N$73: LED1.C R66.1
N$74: R67.1 U$18.16
N$75: R67.2 R68.1 U$18.15
N$76: R69.1 U$18.10 U$23.22
N$77: R69.2 U$18.11 U$23.23
N$78: C11.1 U$23.24
N$79: U$17.4 U$19.D4(CANRX)
N$80: LED1.A U$19.D7(RX3)
N$81: R72.2 U$20.WDO U$21.1
N$82: U$19.A8 U$21.4
N$83: R76.1 U$19.A0 U$20.WDI
N$84: R73.2 U$22.2
N$85: LED2.A R81.1
N$86: R82.1 U$25.D7(RX3)
N$87: LED3.A R82.2
N$88: LED4.A R87.1
N$89: R88.1 U$28.D7(RX3)
N$90: LED5.A R88.2
N$123: LED6.A R111.1
N$124: LED10.A R107.1
N$125: LED11.A R108.1
N$126: LED13.A R109.1
N$127: LED14.A R110.1
N$128: LED9.A R112.1
N$129: SOFT_SSR1.3 U$36.2
N$130: LED7.A R105.1
N$131: R105.2 U$31.D10(TX2)
N$132: 5V.A R106.2
N$133: U$36.P X4.11
N$134: U$36.S X4.6
N$135: IMD_SSR1.1 R114.2
N$136: BMS_SSR1.1 R115.2
N$137: R114.1 X4.3
N$138: R115.1 X4.5
N$139: R116.2 SOFT_SSR1.1
N$140: R117.1 U$31.D13
N$141: R118.2 R119.2 U$6.6
N$142: R120.2 R121.2 U$24.6
OKHS: IC2.3 IMD.P$5 MAIN.7 R41.1
OKHS1: IC5.3 IMD1.P$5 MAIN1.7 R75.1
RESET: R77.1 U$27.22
RESET1: R83.1 U$30.22
RX0: R79.1 U$27.23
RX1: R85.1 U$30.23
SCK: U$6.13 U$8.4 U$9.D13
SCK1: U$18.4 U$19.D13 U$24.13
SHUTDOWN1: D3.A D4.C INTERLOCK1.2 RELAYS1.1 U$13.COIL+
SHUTDOWN2: INTERLOCK1.1 MAIN1.1
SHUTDOWN6: INTERLOCK.1 MAIN.1
SHUTDOWN7: D1.A D2.C INTERLOCK.2 RELAYS.1 U$12.COIL+
SHUTDOWN7_EXT_OUT: D1.C MAIN.2 R118.1
SHUTDOWN7_EXT_OUT1: D3.C MAIN1.2 R120.1
SHUTDOWN_IN: U$33.6 X4.4
SHUTDOWN_IN_A: U$33.5 U$34.6
SHUTDOWN_IN_B: U$34.5 U$35.P
SHUTDOWN_OUT: R110.2 U$35.S X4.9
SW_KILL: R117.2 SOFT_SSR.1
SW_KILL_RELAY: D7.C R109.2 SOFT_SSR.3 U$35.2
TEMP_SENSE_1: CURRENT1.3 U$6.2
TEMP_SENSE_2: CURRENT2.3 U$6.4
TEMP_SENSE_3: CURRENT4.3 U$24.4
TEMP_SENSE_4: CURRENT3.3 U$24.2
TRIM: TRIM+.1 TRIM-.1 U$5.7TRIM
TRIM1: TRIM+1.1 TRIM-1.1 U$14.7TRIM
TSAL+: MAIN.3 TSAL_SSR.3
TSAL+1: MAIN1.3 TSAL_SSR1.3
TSAL_1: TRIM+.2 TSAL_SSR.4 U$5.5VOUT+ U$5.6SENSE+
TSAL_2: TRIM+1.2 TSAL_SSR1.4 U$14.5VOUT+ U$14.6SENSE+
TX0: R78.1 U$27.24
TX1: R84.1 U$30.24
UC_RST: R77.2 U$25.D11
UC_RST1: R83.2 U$28.D11
UC_RX: R79.2 U$25.D9(RX2)
UC_RX1: R85.2 U$28.D9(RX2)
UC_TX: R78.2 U$25.D10(TX2)
UC_TX1: R84.2 U$28.D10(TX2)